# Altium PCB RF_AMPL_001.PcbDoc (part 1 of 2)
Units mm, origin at the board's own origin, x right, y up, seen from the top; angles counter-clockwise.
Board outline 164 x 92 mm, 4 copper layers (TOP, GND, SIG, BOT), stack 1.625 mm thick; 120 components, 60 nets, 294 pads, 1389 vias.
Unrouted connection lines stored in the file: 51.
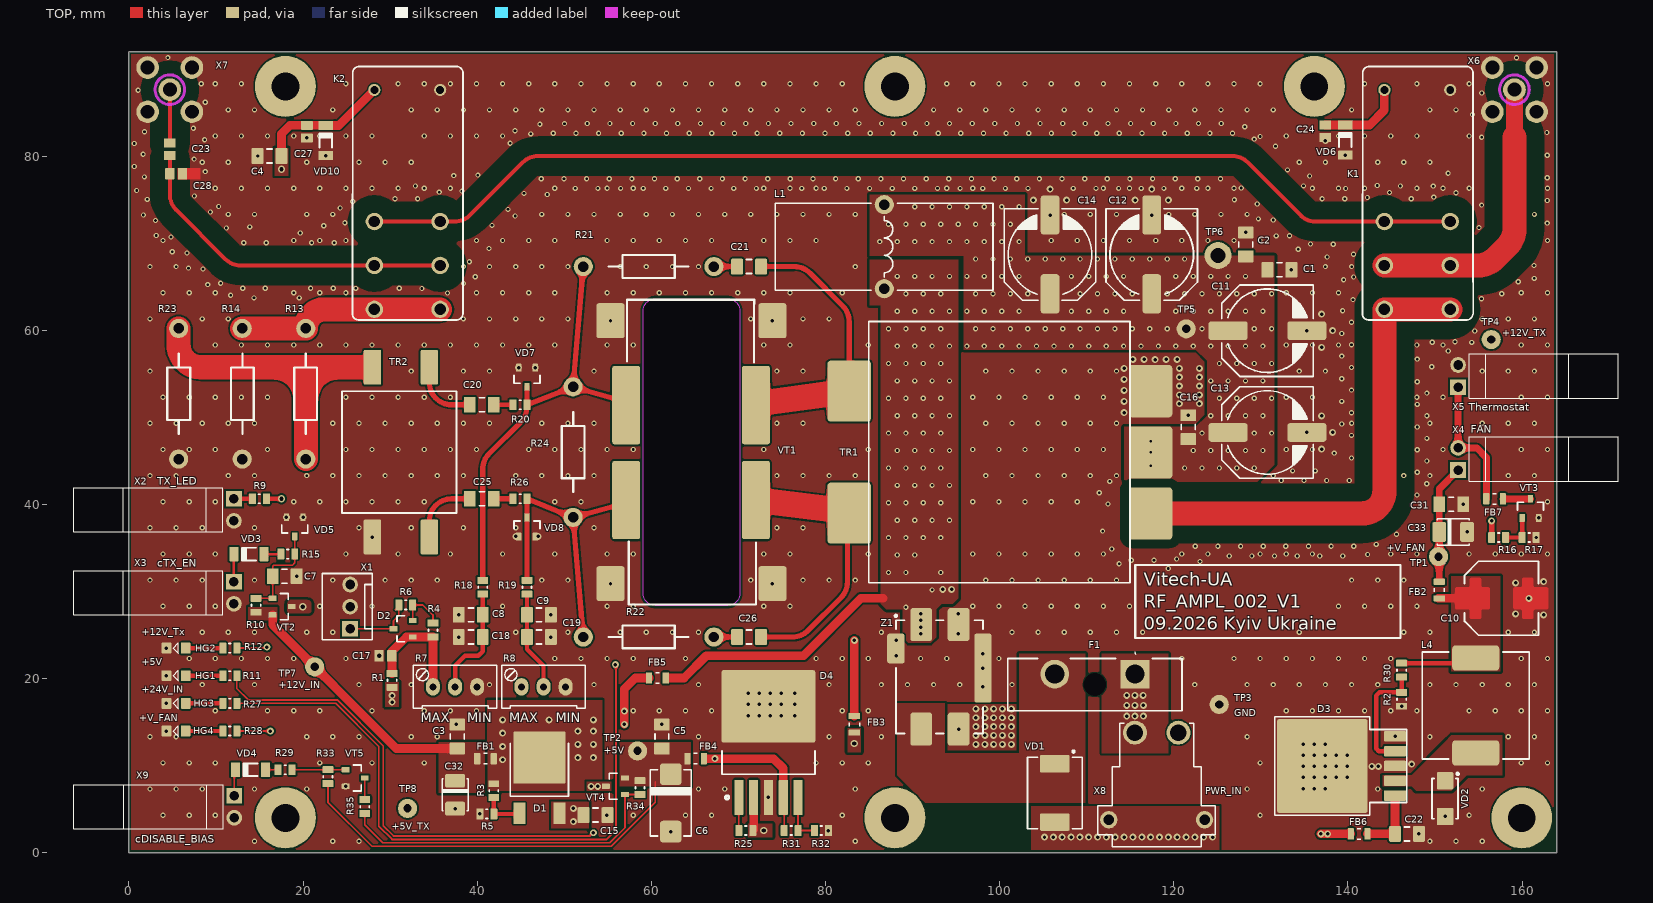
[diagram p0: TOP view]
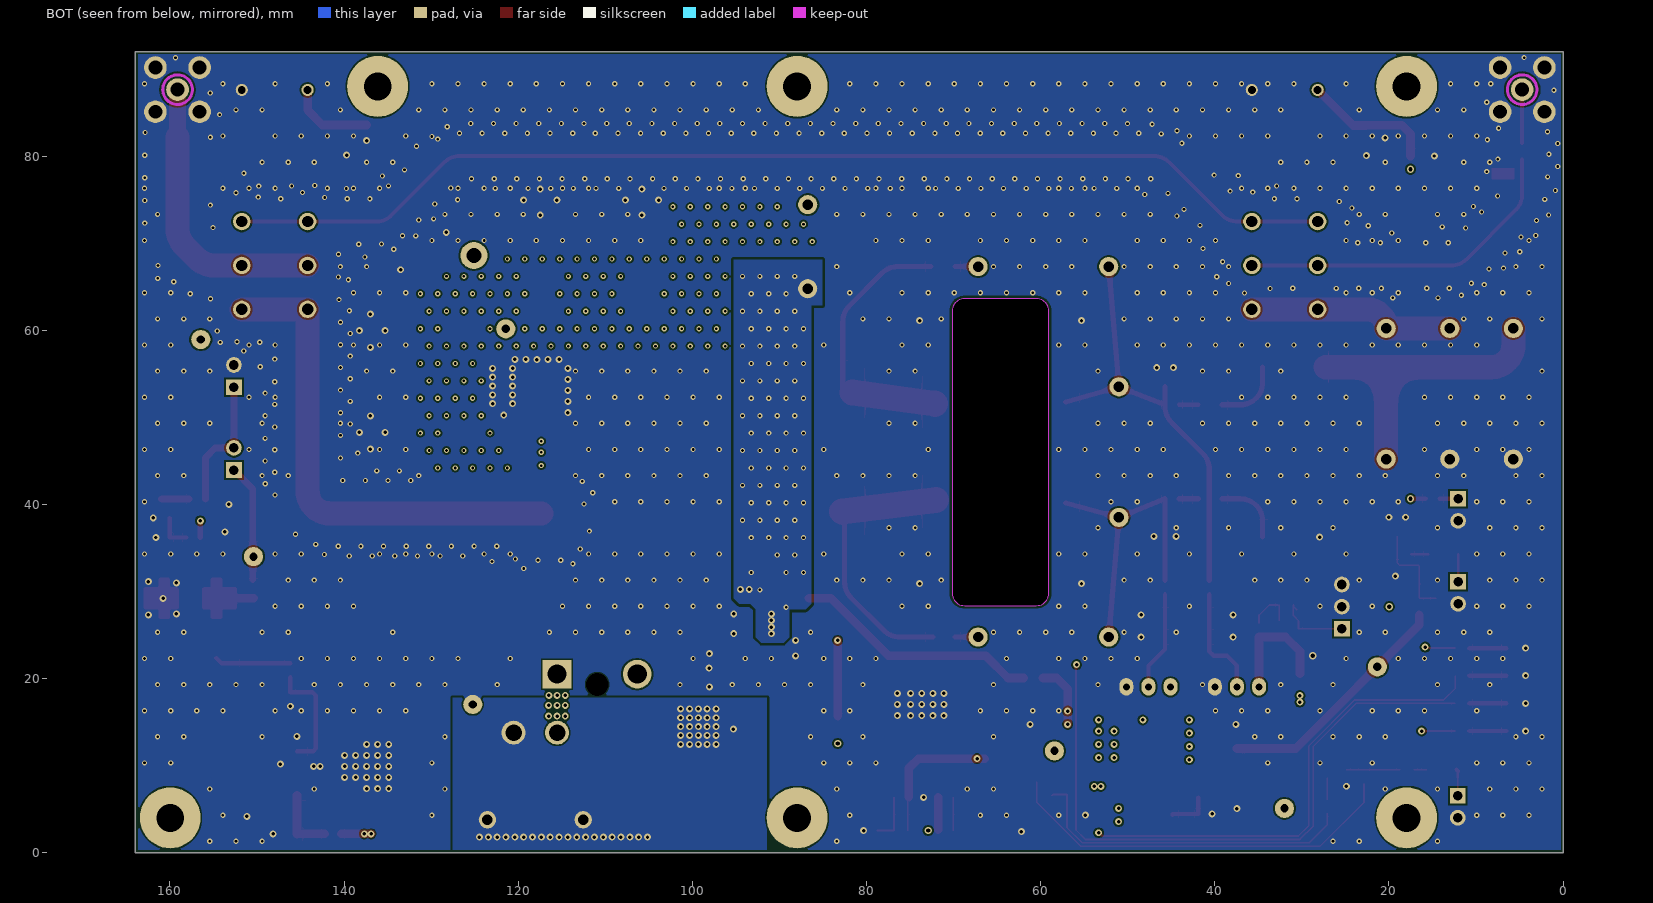
[diagram p1: BOT view, seen from below]
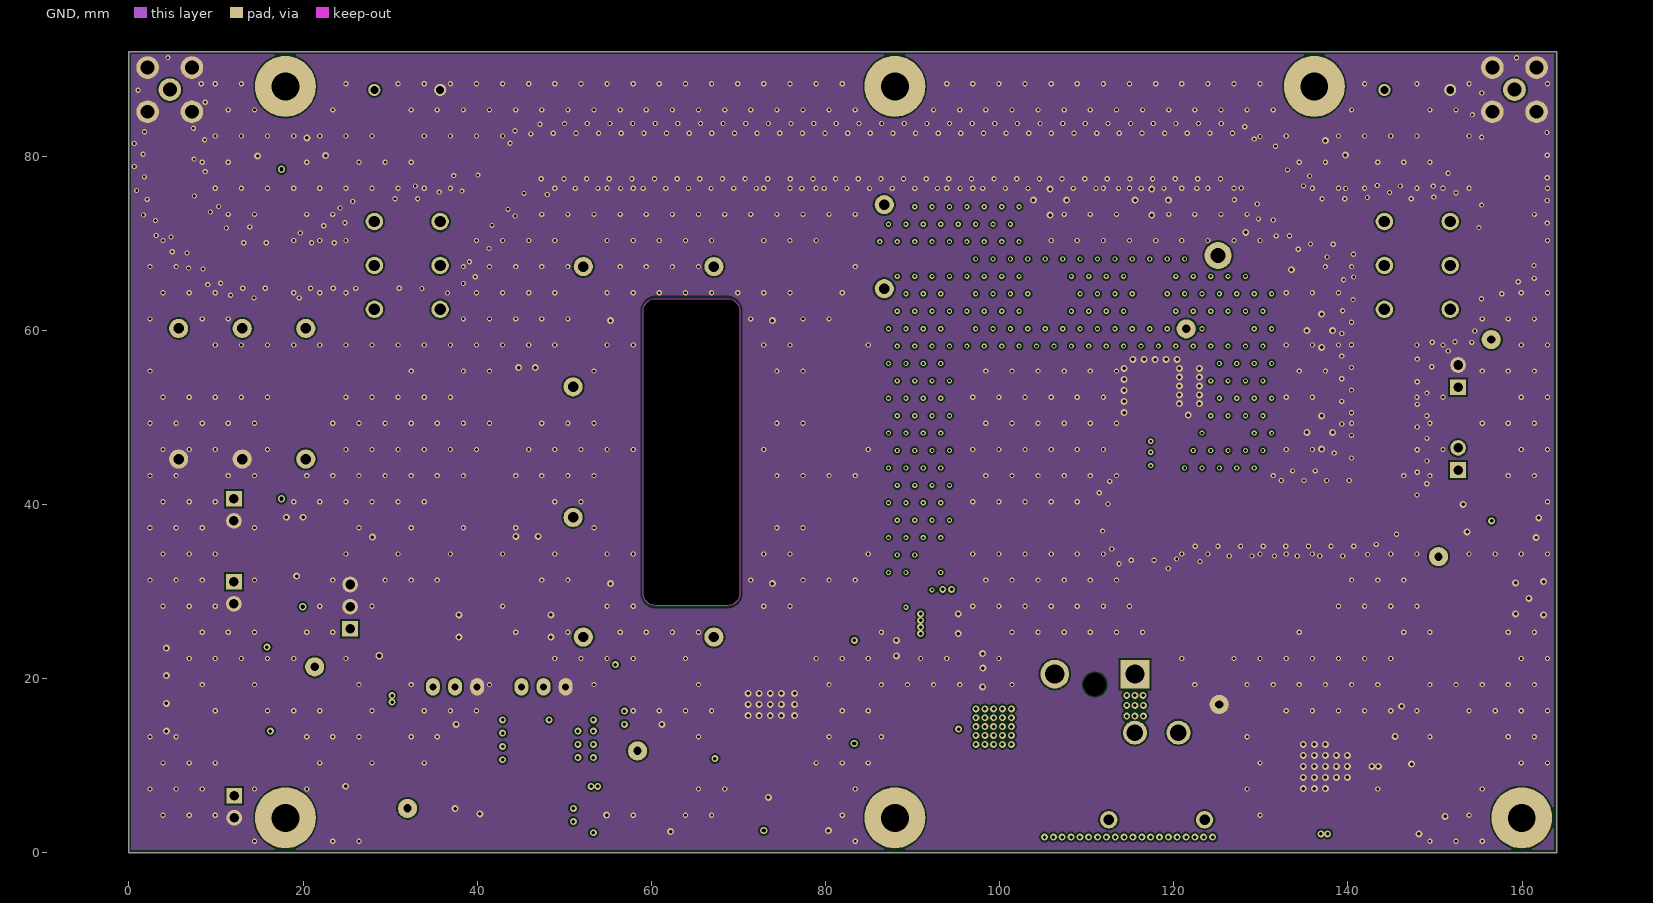
[diagram p2: GND]
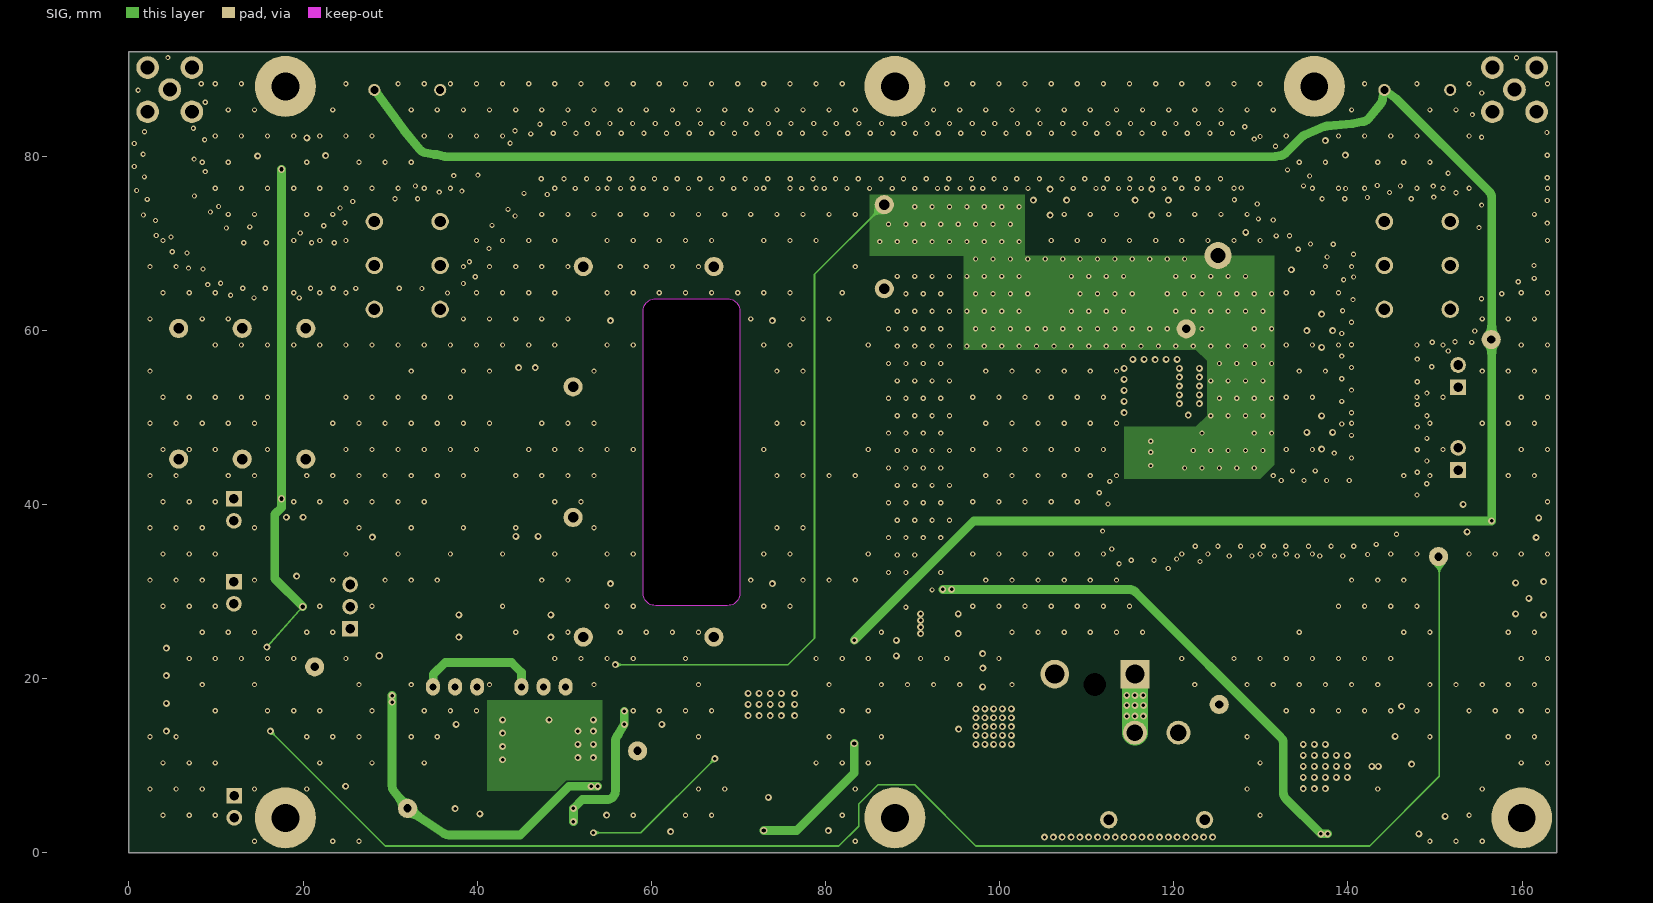
[diagram p3: SIG]
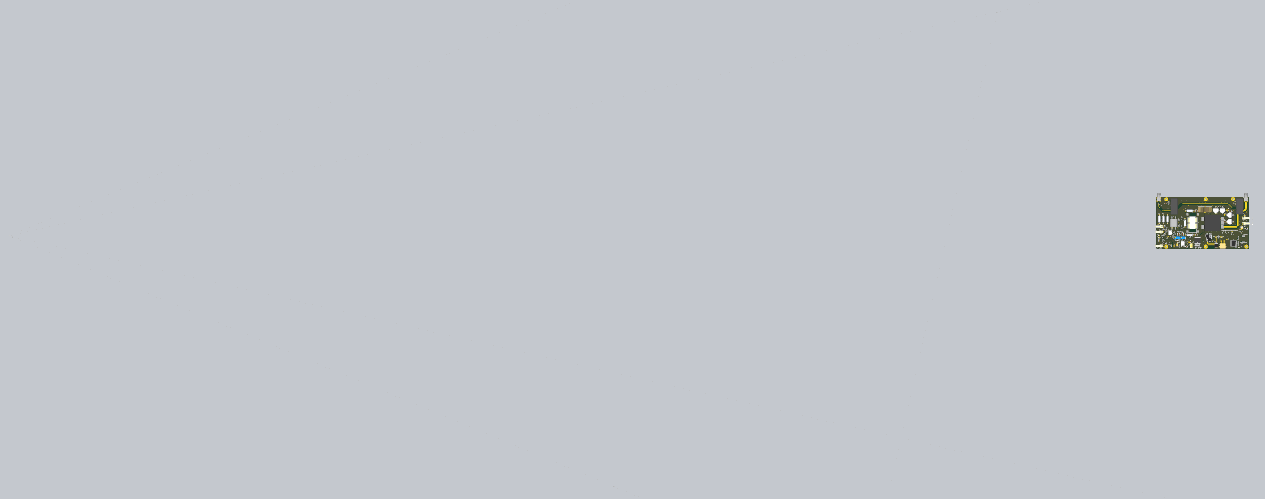
[diagram p5: 3D render of the assembled board from above, using the file's embedded part models]

## Layer stack, top to bottom
Top Solder: solder mask 0.012, Solder Resist, Dk 3.5
TOP: signal copper 0.035
Dielectric 1: prepreg 0.21, 7628, Dk 4.4
GND: signal copper 0.035
Dielectric 3: core 1.065, FR4, Dk 4.6
SIG: signal copper 0.035
Dielectric 2: prepreg 0.21, 7628, Dk 4.4
BOT: signal copper 0.035
Bottom Solder: solder mask 0.012, Solder Resist, Dk 3.5

## Board outline
-0.03,0 -0.03,92 163.97,92 163.97,0

## Design rules (kind name [scope] priority, off if disabled: settings)
BoardOutlineClearance BoardOutlineClearance_1 [OnLayer('Top Overlay')] p1: gap=0 ignorepadtopadclearanceinfootprint=FALSE
BoardOutlineClearance [All] p2: gap=0.3 ignorepadtopadclearanceinfootprint=FALSE
Clearance Clearance_CPW [InNetClass('CPW') vs OnLayer('TOP')] p1: gap=2.03 ignorepadtopadclearanceinfootprint=FALSE except(0.2: Arc-SMDPad Arc-THPad Arc-Region Track-SMDPad Track-Region SMDPad-Region; 0.3: Track-THPad SMDPad-SMDPad SMDPad-THPad; 0.7: Arc-Hole; 1: Track-Track SMDPad-Fill SMDPad-Poly)
Clearance MiddleVoltage [InNetClass('MiddleVoltage')] p2: gap=0.5 ignorepadtopadclearanceinfootprint=FALSE except(0: Arc-Hole Track-Hole SMDPad-Hole THPad-Hole Via-Hole Fill-Hole Poly-Hole Region-Hole Text-Hole; 0.2: Arc-Text Track-Text SMDPad-Text THPad-Text Via-Text Fill-Text Poly-Text Region-Text Text-Text)
Clearance HighVoltage [InNetClass('HighVoltage')] p3: gap=1 ignorepadtopadclearanceinfootprint=FALSE except(0: Arc-Hole Track-Hole SMDPad-Hole THPad-Hole Via-Hole Fill-Hole Poly-Hole Region-Hole Text-Hole; 0.2: Arc-Text Track-Text SMDPad-Text THPad-Text Via-Text Fill-Text Poly-Text Region-Text Text-Text)
Clearance Standart [All] p4: gap=0.15 ignorepadtopadclearanceinfootprint=FALSE except(0.1: THPad-Via; 0.2: Arc-Arc Arc-Track Arc-SMDPad Arc-THPad Arc-Via Arc-Fill Arc-Poly Arc-Region Track-Track Track-SMDPad Track-THPad Track-Via Track-Fill Track-Poly Track-Region SMDPad-Via SMDPad-Poly THPad-Poly Via-Poly Poly-Region Region-Region; 0.3: Arc-Hole Track-Hole Fill-Fill Fill-Poly Fill-Region Poly-Poly)
ComponentClearance [All] p1: gap=0.1 collisioncheckmode=3 verticalgap=0.1 showdistances=TRUE
Height [All] p1: minheight=0 maxheight=40 prefheight=12.7
HoleSize [All] p1: absolutevalues=TRUE maxlimit=12 minlimit=0.2 maxpercent=80.000 minpercent=20.000
HoleToHoleClearance [All] p1: gap=0.15 allowstackedmicrovias=TRUE
MinimumSolderMaskSliver [All] p1: minsoldermaskwidth=0.1
NetAntennae [All] p1: netantennaetolerance=2
PlaneClearance [All] p1: clearance=0.3
PlaneConnect PlaneConnectMiddleCurrent [InNetClass('MiddleCurrent')] p1: planeconnectstyle=Relief reliefexpansion=0.508 reliefentries=4 reliefconductorwidth=0.5 reliefairgap=0.3
PlaneConnect PlaneHighCurrent [InNetClass('HighCurrent')] p2: planeconnectstyle=Relief reliefexpansion=0.508 reliefentries=4 reliefconductorwidth=0.5 reliefairgap=0.35
PlaneConnect [All] p3: planeconnectstyle=Relief reliefexpansion=0.508 reliefentries=4 reliefconductorwidth=0.3 reliefairgap=0.3
PolygonConnect PolygonConnectMiddleCurrent [All vs InNetClass('MiddleCurrent')] p1: connectstyle=Relief reliefconductorwidth=0.4 reliefentries=4 polygonreliefangle="90 Angle" airgapwidth=0.3
PolygonConnect PolygonHighCurrent [InNetClass('HighCurrent')] p2: connectstyle=Relief reliefconductorwidth=0.5 reliefentries=4 polygonreliefangle="90 Angle" airgapwidth=0.3
PolygonConnect PolygonConnect_Keepout [(ObjectKind = 'Track') And (Layer = 'KeepOutLayer')] p3: connectstyle=Direct reliefconductorwidth=0.254 reliefentries=4 polygonreliefangle="90 Angle" airgapwidth=0.254
PolygonConnect PolygonConnect_Via [IsVia] p4: connectstyle=Direct reliefconductorwidth=0.254 reliefentries=4 polygonreliefangle="90 Angle" airgapwidth=0.254
PolygonConnect [All] p5: connectstyle=Direct reliefconductorwidth=0.6 reliefentries=4 polygonreliefangle="90 Angle" airgapwidth=0.2
RoomDefinition RF_AMPL_002 [InComponentClass('RF_AMPL_002')] p1: confinementstyle=ConfineIn formatcopy=TRUE lockcomponents=FALSE outline -783.757,-745.82 -732.957,-745.82 -732.957,-720.42 -783.757,-720.42
RoutingCorners [All] p1: cornerstyle=45-Degree minsetback=1 maxsetback=3
RoutingVias Power [InNetClass('Power')] p1: holewidth=0.8 width=1.5 viastyle="Through Hole" minholewidth=0.5 minwidth=1 maxholewidth=1.2 maxwidth=3
RoutingVias [All] p2: holewidth=0.4 width=0.8 viastyle="Through Hole" minholewidth=0.2 minwidth=0.4 maxholewidth=1 maxwidth=2
SilkToSilkClearance [All] p1: silktosilkclearance=0
SilkToSolderMaskClearance [IsVia vs IsText And OnTopSilkscreen] p1: minsilkscreentomaskgap=0.2 clearancetoexposedcopper=TRUE
SolderMaskExpansion SolderMaskExpansion_VIA [IsVia] p1: expansion=-3 istentingtop=TRUE useseparateexpansions=TRUE expansionbottom=-3 istentingbottom=TRUE
SolderMaskExpansion [All] p2: expansion=0.05 istentingtop=FALSE
SupplyNets "Schematic Supply Nets" [InNet('+V_FAN')] p1: voltage=0.000
SupplyNets "Schematic Supply Nets_8" [InNet('+5V_TX')] p2: voltage=0.000
SupplyNets "Schematic Supply Nets_7" [InNet('GND_IN')] p3: voltage=0.000
SupplyNets "Schematic Supply Nets_6" [InNet('+24V_IN')] p4: voltage=0.000
SupplyNets "Schematic Supply Nets_5" [InNet('GND')] p5: voltage=0.000
SupplyNets "Schematic Supply Nets_4" [InNet('BIAS_A')] p6: voltage=0.000
SupplyNets "Schematic Supply Nets_3" [InNet('BIAS_B')] p7: voltage=0.000
SupplyNets "Schematic Supply Nets_2" [InNet('+12V_IN')] p8: voltage=0.000
SupplyNets "Schematic Supply Nets_1" [InNet('+12V_TX')] p9: voltage=0.000
Width Width_CPW [InNetClass('CPW')] p1: maxlimit=2.77 minlimit=0.46 preferedwidth=2.77
Width Width_1 [All] p2: maxlimit=3 minlimit=0.2 preferedwidth=0.2
Width WidthMiddleCurrent [InNetClass('MiddleCurrent')] p3: maxlimit=2 minlimit=0.35 preferedwidth=0.5
Width WidthHighCurrent [InNetClass('HighCurrent')] p4: maxlimit=5 minlimit=0.5 preferedwidth=1
19 further rules are at their usual default settings.

## Classes and differential pairs
net class CPW: NetC23_1 NetC23_2 NetK1_3 NetK1_5 NetK1_7

## Components (designator, comment, footprint, x,y, rotation, side; value= is the part's Value field where it differs from the comment)
C1 "0.1" C_CERAMIC_1206_MED 132.137,66.944 r180 top
C2 "0.1" C_CERAMIC_1206_MED 128.27,69.85 r90 top
C3 "0.1" C_CERAMIC_1206_MED 37.719,13.335 r90 top
C4 "0.1" C_CERAMIC_1206_MED 16.151,80.01 r180 top
C5 "0.1" C_CERAMIC_1206_MED 61.214,13.335 r90 top
C6 "100мкФ" CAPM_CASE_D_7.3x4.3x3.1mm 62.23,5.715 r270 top
C7 "0.1" C_CERAMIC_1206_MED 17.885,31.75 r0 top
C8 "100" C_CERAMIC_1206_MED 39.265,27.305 r180 top
C9 "100" C_CERAMIC_1206_MED 47.095,27.305 r0 top
C10 "330мкФ" CAPA_CASE_F_Panasonic_FT 157.655,29.21 r0 top
C11 "330 мкФ" CAPA_CASE_G_10.4x10.4x10.5mm 130.763,59.944 r0 top
C12 "330 мкФ" CAPA_CASE_G_10.4x10.4x10.5mm 117.475,68.707 r90 top
C13 "330 мкФ" CAPA_CASE_G_10.4x10.4x10.5mm 130.763,48.26 r0 top
C14 "330 мкФ" CAPA_CASE_G_10.4x10.4x10.5mm 105.791,68.707 r90 top
C15 "0.1" C_CERAMIC_1206_MED 53.594,4.318 r0 top
C16 "0.1" C_CERAMIC_1206_MED 121.666,48.873 r90 top
C17 "18pF" C_CERAMIC_0805_HI 29.464,22.606 r180 top value=10мкФ
C18 "0.1" C_CERAMIC_1206_MED 39.265,24.765 r180 top
C19 "0.1" C_CERAMIC_1206_MED 47.095,24.765 r0 top
C20 "0.1" C_CERAMIC_1206_MED 40.535,51.435 r0 top
C21 "0.1" C_CERAMIC_1206_MED 71.225,67.31 r180 top value=4700
C22 "0.1" C_CERAMIC_1206_MED 146.79,2.152 r0 top
C23 "NC" C_CERAMIC_0805_HI 4.699,80.772 r90 top
C24 "18pF" C_CERAMIC_0805_HI 137.414,82.841 r90 top value=0.1мкФ
C25 "0.1" C_CERAMIC_1206_MED 40.535,40.64 r0 top
C26 "0.1" C_CERAMIC_1206_MED 71.225,24.765 r180 top value=4700
C27 "18pF" C_CERAMIC_0805_HI 20.447,82.804 r90 top value=0.1мкФ
C28 "NC" C_CERAMIC_0805_HI 5.424,77.978 r0 top
C31 "0.1" C_CERAMIC_1206_MED 151.87,40.005 r0 top
C32 "10мкФ" CAPM_CASE_B_3.5x2.8x2.1mm 37.465,6.655 r270 top
C33 "10мкФ" CAPM_CASE_B_3.5x2.8x2.1mm 152.095,36.83 r0 top
D1 "LM317MDTRKG" DPAK 47.145,9.525 r0 top
D2 "TL431ACDBZR" SOT-23_MED 31.496,25.715 r0 top
D3 "LM2596SX-ADJ/NOPB" TO-263-5-1 145.415,9.955 r90 top
D4 "NCP57152DSADJR4G" DDPAK-5 73.457,12.45 r0 top
F1 "STANDART_FUSE_HOLDER" 17861640001 115.541,20.504 r180 top
FB1 "BLM21PG221SN1D" BLM21PGxxxxN1-Series 40.955,10.795 r180 top value="220 Ohms @ 100MHz"
FB2 "BLM21PG221SN1D" BLM21PGxxxxN1-Series 150.495,30.16 r90 top value="220 Ohms @ 100MHz"
FB3 "BLM21PG221SN1D" BLM21PGxxxxN1-Series 83.312,14.732 r270 top value="220 Ohms @ 100MHz"
FB4 "BLM21PG221SN1D" BLM21PGxxxxN1-Series 65.085,10.795 r180 top value="220 Ohms @ 100MHz"
FB5 "BLM21PG221SN1D" BLM21PGxxxxN1-Series 60.706,20.066 r180 top value="220 Ohms @ 100MHz"
FB6 "BLM21PG221SN1D" BLM21PGxxxxN1-Series 141.29,2.159 r0 top value="220 Ohms @ 100MHz"
FB7 "BLM21PG221SN1D" BLM21PGxxxxN1-Series 156.845,40.64 r0 top value="220 Ohms @ 100MHz"
HG1 "LTST-C171GKT" LTST-C171GKT 5.418,20.32 r180 top
HG2 "LTST-C171GKT" LTST-C171GKT 5.418,23.495 r180 top
HG3 "LTST-C171GKT" LTST-C171GKT 5.418,17.145 r180 top
HG4 "LTST-C171GKT" LTST-C171GKT 5.418,13.97 r180 top
K1 "HF115F/012-2ZS4" HF115Fxxx-1(2)Zx3(4) 147.97,75 r270 top
K2 "HF115F/012-2ZS4" HF115Fxxx-1(2)Zx3(4) 31.97,75 r270 top
L1 "Fixed inductor, 10мкH, ±20%, R22.9/14/7.62, Kool Mu, µ=125, 90 нГн/витков2" "IND: R22.9/14/7.62 (H)" 86.741,69.596 r270 top value=10мкH
L4 "33 мкГн" INDPWR_Sumida_CDRH127/LD_INDM120120X80N 154.686,16.902 r90 top
R1 "100" R_ANY_CHIP_0805_HI 30.226,19.774 r90 top
R2 "10кОм" R_ANY_CHIP_0805_HI 146.177,17.615 r270 top
R3 "240" R_ANY_CHIP_0805_HI 41.91,7.112 r90 top
R4 "1к5" R_ANY_CHIP_0805_HI 34.925,25.565 r90 top
R5 "2кОм" R_ANY_CHIP_0805_HI 41.11,4.445 r0 top
R6 "1к8" R_ANY_CHIP_0805_HI 31.796,28.448 r180 top
R7 "10k" 3296W-1-xxx 37.465,19.05 r270 top
R8 "10k" 3296W-1-xxx 47.625,19.05 r270 top
R9 "2к2" R_ANY_CHIP_0805_HI 14.986,40.64 r0 top
R10 "10к" R_ANY_CHIP_0805_HI 14.605,28.41 r270 top
R11 "390" R_ANY_CHIP_0805_HI 11.595,20.32 r0 top
R12 "2к" R_ANY_CHIP_0805_HI 11.595,23.495 r180 top
R13 "68" FKN2WS-Series 20.32,52.705 r270 top
R14 "100" FKN2WS-Series 13.018,52.705 r90 top
R15 "100" R_ANY_CHIP_0805_HI 18.25,34.29 r180 top
R16 "750" R_ANY_CHIP_0805_HI 157.315,36.195 r0 top
R17 "10к" R_ANY_CHIP_0805_HI 160.82,36.195 r180 top
R18 "100" R_ANY_CHIP_0805_HI 40.64,30.48 r90 top
R19 "100" R_ANY_CHIP_0805_HI 45.72,30.48 r90 top
R20 "10" R_ANY_CHIP_0805_HI 44.92,51.435 r0 top
R21 "750" FKN2WS-Series 59.69,67.31 r180 top
R22 "750" FKN2WS-Series 59.69,24.765 r180 top
R23 "100" FKN2WS-Series 5.715,52.705 r90 top
R24 "100" FKN2WS-Series 51.012,46 r90 top
R25 "10кОм" R_ANY_CHIP_0805_HI 70.853,2.54 r180 top
R26 "10" R_ANY_CHIP_0805_HI 44.92,40.64 r0 top
R27 "4k7" R_ANY_CHIP_0805_HI 11.595,17.145 r180 top
R28 "2k" R_ANY_CHIP_0805_HI 11.595,13.97 r180 top
R29 "10" R_ANY_CHIP_0805_HI 17.945,9.525 r180 top
R30 "100кОм" R_ANY_CHIP_0805_HI 146.177,20.955 r270 top
R31 "30кОм" R_ANY_CHIP_0805_HI 76.06,2.54 r0 top
R32 "10кОм" R_ANY_CHIP_0805_HI 79.54,2.54 r0 top
R33 "10к" R_ANY_CHIP_0805_HI 22.86,8.725 r270 top
R34 "1к" R_ANY_CHIP_0805_HI 58.705,7.47 r90 top
R35 "100" R_ANY_CHIP_0805_HI 27.092,5.296 r90 top
TP1 "PAD-0.96mm" PAD-0.96mm 150.411,34 r0 top
TP2 "PAD-0.96mm" PAD-0.96mm 58.42,11.684 r90 top
TP3 "PAD-0.96mm" PAD-0.96mm 125.222,17.018 r90 top
TP4 "PAD-0.96mm" PAD-0.96mm 156.464,58.928 r90 top
TP5 "PAD-0.96mm" PAD-0.96mm 121.433,60.157 r90 top
TP6 "PAD-1.75mm" PAD-1.75mm 125.095,68.58 r0 top
TP7 "PAD-0.96mm" PAD-0.96mm 21.336,21.336 r90 top
TP8 "PAD-0.96mm" PAD-0.96mm 32.004,5.08 r90 top
TR1 "TR" Amidon_43-7051 99.97,46 r0 top
TR2 "TR" Amidon_43-202 31.242,46 r90 top
VD1 "ES3D" SMC 106.341,6.858 r270 top
VD2 "SK34SMA-3G" SMA_MED 151.159,6.205 r270 top
VD3 "LL4148" SOD-80C_MED 13.79,34.29 r0 top
VD4 "LL4148" SOD-80C_MED 13.97,9.525 r0 top
VD5 "PESD12VL2BT.215" SOT-23_MED 19.05,37.422 r90 top
VD6 "LL4148" SOD-80C_MED 139.7,81.841 r270 top
VD7 "PESD12VL2BT.215" SOT-23_MED 45.72,54.6 r90 top
VD8 "PESD12VL2BT.215" SOT-23_MED 45.72,37.4 r270 top
VD10 "LL4148" SOD-80C_MED 22.606,81.788 r270 top
VT1 "MRF186" MRF186 64.612,46 r270 top
VT2 "IRLML9303TRPbF" SOT-23_MED 17.61,28.26 r180 top
VT3 "IRLML0100TR" SOT-23_MED 160.97,39.54 r270 top
VT4 "IRLML9303TRPbF" SOT-23_MED 55.88,7.62 r0 top
VT5 "BC847B" SOT-23_MED 25.992,8.575 r180 top
X1 "WH-03S" WF-3S 25.4,25.715 r90 top
X2 "WH-02R" WF-2R 12.065,39.37 r90 top
X3 "WH-02R" WF-2R 12.065,29.845 r90 top
X4 "WH-02R" WF-2R 152.654,45.212 r270 top
X5 "WH-02R" WF-2R 152.654,54.737 r270 top
X6 "WSD-SMAKWE-14.5" KLS1-SMA002 159.131,87.63 r270 top
X7 "WSD-SMAKWE-14.5" KLS1-SMA002 4.699,87.63 r270 top
X8 "XT30PW-M" XT30PW-M 118.041,5.279 r90 top
X9 "WH-02R" WF-2R 12.094,5.271 r90 top
Z1 "" Murata_BNX02xH01x 93.091,20.193 r90 top

## Footprints (in the part's own frame and the unit in brackets; to place one, negate y for a bottom-side part, rotate by r counter-clockwise, add the part's x,y. Pads: shape width x height; smd on the part's side, far side on the other; paste and mask are expansions set on the pad)
3296W-1-xxx [mm] "Square Trimpot Trimming Potentiometer"
  oval 2x1.6 hole 0.8 mask+0.05: 1(0,-2.54) 2(0,0) 3(0,2.54)
  silkscreen extent -2.45,-4.8 2.45,4.8, body extent -2.45,-4.76 2.38,4.76, height 11.6
17861640001 [mm] "Automotive Fuse holder THT-Mount"
  rect 3.3x3.3 hole 2.2: 1(0,0)
  round 3.3 hole 2.2: 2(9.2,0)
  round 1.3 hole 2.6 unplated: MH1(4.6,1.2)
  silkscreen extent -5.4,-2.51 14.6,4.2, body extent -5.51,-1.78 14.64,4.22, height 17.65
Amidon_43-202 [mm]
  rrect15% 4x2 smd mask+0.05: 1(-9.75,3.27) 2(9.75,3.27) 3(-9.75,-3.27) 4(9.75,-3.27)
  silkscreen extent -6.98,-6.38 6.98,6.76, body extent -7,-6.35 7,6.75, height 7.75
Amidon_43-7051 [mm]
  rrect15% 5x6 smd mask+0.05: 1(17.37,6.998) 2(17.37,-7.041) 4(17.37,-0.04)
  rrect15% 5x7 smd mask+0.05: 3(-17.243,-7.002) 5(-17.243,7.002)
  silkscreen extent -15,-15 15,15, body extent -14.35,-14.28 14.35,14.28, height 14.33
BLM21PGxxxxN1-Series [mm] "Chip Inductor, 2-Leads, Body 2,00x1,25mm, IPC Medium Density"
  rrect15% 0.7x1.3 smd mask+0.05: 1(0.95,0) 2(-0.95,0)
  silkscreen extent -0.2,-0.6 0.2,0.6, body extent -1,-0.6 1,0.6, height 0.95
C_CERAMIC_0805_HI [mm] "Chip Capacitor, 2-Leads, Body 2,00x1,25mm, IPC High Density"
  rrect15% 1.05x1.35 smd mask+0.05: 1(-0.725,0) 2(0.725,0)
  TOP pour cut-out: -0.05,0.65 0.05,0.65 0.05,-0.65 -0.05,-0.65
  body extent -1.1,-0.72 1.1,0.73, height 1.35
C_CERAMIC_1206_MED [mm] "Chip Capacitor, 2-Leads, Body 3,20x1,60mm, IPC Medium Density"
  rrect15% 1.35x1.8 smd mask+0.05: 1(-1.375,0) 2(1.375,0)
  silkscreen extent -0.3,-0.8 0.3,0.8, body extent -1.7,-0.9 1.7,0.9, height 1.8
CAPA_CASE_F_Panasonic_FT [mil] "Aluminum Electrolytic Capacitor, Body 8.3x8.3x10.5mm, FT series, Panasonic"
  round 1 smd mask+1.97: 1(-131.89,0) 2(131.89,0)
  TOP region: 210.63,-41.34 210.63,41.34 210.03,44.35 208.32,46.91 205.77,48.61 202.76,49.21 202.76,49.21 151.57,49.21 148.56,49.81 146.01,51.52 144.3,54.07 143.7,57.09 143.7,57.09 143.7,84.65 143.1,87.66 141.39,90.21 138.84,91.92 135.83,92.52 135.83,92.52 100.39,92.52 97.38,91.92 94.83,90.21 93.12,87.66 92.52,84.65 92.52,84.65 92.52,57.09 91.92,54.07 90.21,51.52 87.66,49.81 84.65,49.21 84.65,49.21 61.02,49.21 58.01,48.61 55.46,46.91 53.75,44.35 53.15,41.34 53.15,41.34 53.15,-41.34 53.75,-44.35 55.46,-46.91 58.01,-48.61 61.02,-49.21 61.02,-49.21 84.65,-49.21 87.66,-49.81 90.21,-51.52 91.92,-54.07 92.52,-57.09 92.52,-57.09 92.52,-84.65 93.12,-87.66 94.83,-90.21 97.38,-91.92 100.39,-92.52 100.39,-92.52 135.83,-92.52 138.84,-91.92 141.39,-90.21 143.1,-87.66 143.7,-84.65 143.7,-84.65 143.7,-57.09 144.3,-54.07 146.01,-51.52 148.56,-49.81 151.57,-49.21 151.57,-49.21 202.76,-49.21 205.77,-48.61 208.32,-46.91 210.03,-44.35 210.63,-41.34
  TOP region: -210.63,-41.34 -210.63,41.34 -210.03,44.35 -208.32,46.91 -205.77,48.61 -202.76,49.21 -202.76,49.21 -151.57,49.21 -148.56,49.81 -146.01,51.52 -144.3,54.07 -143.7,57.09 -143.7,57.09 -143.7,84.65 -143.1,87.66 -141.39,90.21 -138.84,91.92 -135.83,92.52 -135.83,92.52 -100.39,92.52 -97.38,91.92 -94.83,90.21 -93.12,87.66 -92.52,84.65 -92.52,84.65 -92.52,57.09 -91.92,54.07 -90.21,51.52 -87.66,49.81 -84.65,49.21 -84.65,49.21 -61.02,49.21 -58.01,48.61 -55.46,46.91 -53.75,44.35 -53.15,41.34 -53.15,41.34 -53.15,-41.34 -53.75,-44.35 -55.46,-46.91 -58.01,-48.61 -61.02,-49.21 -61.02,-49.21 -84.65,-49.21 -87.66,-49.81 -90.21,-51.52 -91.92,-54.07 -92.52,-57.09 -92.52,-57.09 -92.52,-84.65 -93.12,-87.66 -94.83,-90.21 -97.38,-91.92 -100.39,-92.52 -100.39,-92.52 -135.83,-92.52 -138.84,-91.92 -141.39,-90.21 -143.1,-87.66 -143.7,-84.65 -143.7,-84.65 -143.7,-57.09 -144.3,-54.07 -146.01,-51.52 -148.56,-49.81 -151.57,-49.21 -151.57,-49.21 -202.76,-49.21 -205.77,-48.61 -208.32,-46.91 -210.03,-44.35 -210.63,-41.34
  silkscreen extent -167,-167 167,167, body extent -191,-163 191,163, height 414
CAPA_CASE_G_10.4x10.4x10.5mm [mm] "Aluminum Electrolytic Capacitor, Body 10.40x10.40x10.50mm, IPC Medium Density"
  rrect30% 4.5x2.15 smd mask+0.1: 1(-4.525,0) 2(4.525,0)
  silkscreen extent -5.25,-5.25 5.25,5.25, body extent -5.5,-5.2 5.5,5.2, height 10.41
CAPM_CASE_B_3.5x2.8x2.1mm [mm] "Molded Capacitor, 2-Leads, Body 3.50x2.8mm."
  rrect30% 1.6x2.3 smd paste+0 mask+0.05: 1(-1.6,0) 2(1.6,0)
  silkscreen extent -1.85,-1.5 1.85,1.5, body extent -1.83,-1.4 1.83,1.4, height 1.9
CAPM_CASE_D_7.3x4.3x3.1mm [mm] "Molded Capacitor, 2-Leads, Body 7.3x4.3mm"
  rrect30% 2.5x2.5 smd paste+0 mask+0.05: 1(-3.3,0) 2(3.3,0)
  silkscreen extent -3.8,-2.35 3.8,2.35, body extent -3.8,-2.3 3.8,2.3, height 3.1
DDPAK-5 [mm] "D2-PAK, 5-Pads, Body 9.3x10.2mm (max), IPC Medium Density"
  rrect15% 1.05x4.039 smd mask+0.05: 1(-3.404,-6.1) 2(-1.702,-6.1) 3(0,-6.1) 4(1.702,-6.1) 5(3.404,-6.1)
  rrect5% 10.75x8.319 smd: 3(0,4.343)
  silkscreen extent -5.35,-6.3 5.35,-0.75, body extent -5.33,-7.21 5.32,7.7, height 4.82
DPAK [mm]
  rrect15% 1.4x2.5 smd mask+0.05: 1(-2.3,-5) 3(2.3,-5)
  rrect5% 6x6 smd paste-2539.97 mask+0.05: 2(0,1.4)
  silkscreen extent -3.35,-3.05 3.35,3.05, body extent -3.36,-6.03 3.36,4.38, height 2.39
FKN2WS-Series [mm]
  round 2.2 hole 1.2 mask+0.05: 1(-7.5,0) 2(7.5,0)
  silkscreen extent -4.59,-1.33 4.59,1.3, body extent -7.9,-2.55 7.9,2.55, height 4.85
HF115Fxxx-1(2)Zx3(4) [mm] "Miniature High Power Relay"
  round 1.4 hole 0.9: 1(-12.6,3.78) 2(-12.6,-3.78)
  round 2 hole 1.3: 3(2.52,3.78) 4(2.52,-3.78) 5(7.56,3.78) 6(7.56,-3.78) 7(12.6,3.78) 8(12.6,-3.78)
  silkscreen extent -15.29,-6.3 13.82,6.41, body extent -15.17,-6.35 13.83,6.35, height 15.7
"IND: R22.9/14/7.62 (H)" [mm]
  round 2.2 hole 1.2: 1(-4.83,0.015) 2(4.83,0.015)
  silkscreen extent -5,-12.5 5,12.5, body extent -4.83,-12.47 4.83,12.47, height 24.77
INDPWR_Sumida_CDRH127/LD_INDM120120X80N [mm] "Molded Inductor, 2-Leads, Body 12.00x12.00mm, IPC Medium Density"
  rrect25% 2.9x5.4 smd: 1(-5.45,0) 2(5.45,0)
  silkscreen extent -6.15,-6.15 6.15,6.15, body extent -6.15,-6 6.2,6, height 7.5
KLS1-SMA002 [mm] "SMA Connector, Right Angle"
  round 2.6 hole 1.6 mask+0.05: 1(0,0) 2(-2.54,2.54) 2(-2.54,-2.54) 2(2.54,2.54) 2(2.54,-2.54)
  TOP pour cut-out: -1.9,0 -1.755,-0.727 -1.344,-1.344 -0.727,-1.755 0,-1.9 0,-1.9 0.727,-1.755 1.344,-1.344 1.755,-0.727 1.9,0 1.9,0 1.755,0.727 1.344,1.344 0.727,1.755 0,1.9 0,1.9 -0.727,1.755 -1.344,1.344 -1.755,0.727 -1.9,0
  TOP keep-out circle w0.35: c0,0 r1.7
  BOT pour cut-out: -1.9,0 -1.755,-0.727 -1.344,-1.344 -0.727,-1.755 0,-1.9 0,-1.9 0.727,-1.755 1.344,-1.344 1.755,-0.727 1.9,0 1.9,0 1.755,0.727 1.344,1.344 0.727,1.755 0,1.9 0,1.9 -0.727,1.755 -1.344,1.344 -1.755,0.727 -1.9,0
  BOT keep-out circle w0.35: c0,0 r1.7
  body extent -11.58,-3.2 3.28,3.15, height 9.57
LTST-C171GKT [mm]
  rrect15% 1.1x1.25 smd mask+0.05: AN(-1.1,0) CA(1.1,0)
  silkscreen extent -0.25,-0.6 0.35,0.6, body extent -1.05,-0.67 1.05,0.68, height 0.9
MRF186 [mm]
  rrect15% 9x3.2 smd mask+0.05: 1(-5.4,7.4) 2(5.5,7.4) 3(-5.4,-7.5) 4(5.5,-7.5)
  rrect15% 4x3.2 smd mask+0.05: 5(-15.1,9.3) 5(-15.1,-9.3) 5(15.1,9.3) 5(15.1,-9.3)
  Keep-Out Layer board cut-out: -16.23,-5.527 -16.765,-5.421 -17.218,-5.118 -17.521,-4.665 -17.627,-4.13 -17.627,-4.13 -17.627,4.136 -17.521,4.671 -17.218,5.125 -16.765,5.427 -16.23,5.534 -16.23,5.534 16.23,5.534 16.765,5.427 17.218,5.125 17.521,4.671 17.627,4.136 17.627,4.136 17.627,-4.13 17.521,-4.665 17.218,-5.118 16.765,-5.421 16.23,-5.527 16.23,-5.527 10.875,-5.527 -10.66,-5.527
  silkscreen extent -17.5,-7.4 17.5,7.4, body extent -16.95,-7.35 17.05,7.25, height 2.3
Murata_BNX02xH01x [mm] "Chip Resistor, 2-Leads, Body 2.00x1.25mm, IPC Medium Density"
  rrect25% 3.8x2.5 smd mask+0.05: 1(-6,2.1) 2(6,2.1) 3(-6,-2.2) 4(6,-2.2)
  rrect25% 3.4x2 smd mask+0.05: 5(3.25,5)
  rrect25% 7.9x2 smd mask+0.05: 6(1,-5)
  silkscreen extent -6.5,-5 7.12,5.12, body extent -6.05,-4.55 6.05,4.55, height 3.1
PAD-0.96mm [mm]
  round 2.2 hole 0.96: 1(0,0)
PAD-1.75mm [mm]
  round 3.1 hole 1.75: 1(0,0)
R_ANY_CHIP_0805_HI [mm] "Chip Resistor, 2-Leads, Body 2,00x1,25mm, IPC High Density"
  rrect15% 0.8x1.25 smd: 1(-0.8,0) 2(0.8,0)
  silkscreen extent -0.1,-0.53 0.1,0.53, body extent -1,-0.67 1,0.68, height 0.6
SMA_MED [mm] "Molded Diode, 2-Leads, Body 4,30x2,61mm, IPC Medium Density"
  rrect15% 2x1.9 smd mask+0.05: AN(2.05,0) CA(-2.05,0)
  silkscreen extent -2.97,-1.5 2.3,1.58, body extent -2.52,-1.46 2.52,1.46, height 2.44
SMC [mm] "Molded Diode, 2-Leads, Body 7,95x5,90mm, IPC Medium Density"
  rrect15% 2x3.4 smd: AN(3.35,0) CA(-3.35,0)
  silkscreen extent -4.87,-3.15 4.1,3.15, body extent -3.9,-2.95 3.9,2.95, height 2.45
SOD-80C_MED [mm] "MELF Diode, 2-Leads, Body 3,50x1,45mm, IPC Medium Density"
  rrect15% 1.05x1.65 smd mask+0.05: AN(1.725,0) CA(-1.725,0)
  silkscreen extent -0.8,-0.72 0.8,0.72, body extent -1.75,-0.72 1.75,0.72, height 1.45
SOT-23_MED [mm] "SOT23, 3-Leads, Body 2,92x2,37mm, Pitch 0,95mm, IPC Medium Density"
  rrect15% 0.9x0.6 smd mask+0.05: 1(1.1,-0.95) 2(1.1,0.95) 3(-1.1,0)
  silkscreen extent -0.7,-1.5 0.2,1.5, body extent -1.25,-1.5 1.25,1.5, height 1.1
TO-263-5-1 [mm]
  rrect15% 1.2x2.5 smd mask+0.05: 1(-3.4,0) 2(-1.7,0) 3(0,0) 4(1.7,0) 5(3.4,0)
  rrect5% 10.8x10.4 smd mask+0.05: 6(0,8.35)
  silkscreen extent -5.65,-1.35 5.65,13.8, body extent -5.08,-1.07 5.08,13.57, height 4.57
WF-2R [mm]
  rect 1.8x1.8 hole 1.1: 1(1.27,0)
  round 1.8 hole 1.1: 2(-1.27,0)
  silkscreen extent -2.54,1.27 2.54,18.41, body extent -2.54,-0.33 2.54,13.5, height 5.8
WF-3S [mm] "Connector; Header; 3 Position"
  rect 1.8x1.8 hole 1.1: 1(0,0)
  round 1.8 hole 1.1: 2(2.54,0) 3(5.08,0)
  silkscreen extent -1.27,-2.54 6.35,3.2, body extent -1.25,-2.6 6.25,3.2, height 11.62
XT30PW-M [mm]
  round 2.75 hole 1.9: 1(8.5,2.5) 2(8.5,-2.5)
  round 2 hole 1.2: MP(-1.5,5.5) MP(-1.5,-5.5)
  silkscreen extent -4.6,-6.75 9.6,6.75, body extent -4.5,-6.65 9.45,6.65, height 5.05

## Part data
C1 C2 C3 C4 C5 C15 C16 C22 C31: library part 1206B102K102CG, "1nF 1000V X7R ±10% 1206 Ceramic Capacitor RoHS", Dielectric Type=X7R, Manufacturer=Walsin, Package=1206, Supplier Part Number 1=791-1206B102K102CT, Temperature Range="-55°C ~ 125°C", Tolerance=±10%, Voltage=100V, Component Status=Released, Component Type=SMD, ComponentLink1Description=Datasheet, ComponentLink1URL=https://eu.mouser.com/datasheet/2/210/Middle_and_High_Voltage_DS-1535659.pdf, Part Number=1206B102K102CG, Part Type="Ceramic / X7R / 1206", Price=0, Replacement=NONE, Standard Lead Time="31 Weeks", Supplier 1=Mouser
C6: library part CAP_TANTALUM_POLAR_CASE_D, "Capacitor Tantalum *pF ±*% *V Case D", Dielectric=X7R, Manufacturer=AVX, Max Operating Temperature=+125°C, Min Operating Temperature=-55°C, Package="Case D", Part Number=TAJD107M016R, Tolerance=±*%, Voltage=16В, ComponentLink1Description="Datasheet Link", Mount=SMT, Name="100мкФ ±*% 16В X7R Case D TAJD107M016R [AVX]", Number of Pins=2, Type="Конденсатор танталовий"
C7: library part 1206B102K102CG, "1nF 1000V X7R ±10% 1206 Ceramic Capacitor RoHS", Dielectric Type=X7R, Manufacturer=Walsin, Package=1206, Supplier Part Number 1=791-1206B102K102CT, Temperature Range="-55°C ~ 125°C", Tolerance=±10%, Voltage=50V, Component Status=Released, Component Type=SMD, ComponentLink1Description=Datasheet, ComponentLink1URL=https://eu.mouser.com/datasheet/2/210/Middle_and_High_Voltage_DS-1535659.pdf, Part Number=1206B102K102CG, Part Type="Ceramic / X7R / 1206", Price=0, Replacement=NONE, Standard Lead Time="31 Weeks", Supplier 1=Mouser
C8 C9 C18 C19 C20 C25: library part 1206B102K102CG, "1nF 1000V X7R ±10% 1206 Ceramic Capacitor RoHS", Dielectric Type=X7R, Manufacturer=Walsin, Package=1206, Supplier Part Number 1=791-1206B102K102CT, Temperature Range="-55°C ~ 125°C", Tolerance=±10%, Voltage=1000V, Component Status=Released, Component Type=SMD, ComponentLink1Description=Datasheet, ComponentLink1URL=https://eu.mouser.com/datasheet/2/210/Middle_and_High_Voltage_DS-1535659.pdf, Part Number=1206B102K102CG, Part Type="Ceramic / X7R / 1206", Price=0, Replacement=NONE, Standard Lead Time="31 Weeks", Supplier 1=Mouser
C10: library part CAP_ELECTROLYTIC_POLAR_CASE_F_Panasonic_FT, "Capacitor Electrolytic *pF ±*% *V Case F", Manufacturer=Panasonic, Max Operating Temperature=+105°C, Min Operating Temperature=-55°C, Package="Case F", Part Number=EEEFK1C331P, Tolerance=±*%, Voltage=16В, ComponentLink1Description="Datasheet Link", Mount=SMT, Name="330мкФ ±*% 16В  Case F EEEFK1C331P [Panasonic]", Number of Pins=2, Type="Конденсатор електролітичний поляризований"
C11 C12 C13 C14: library part CAP_ELECTROLYTIC_POLAR_CASE_G, "Capacitor Electrolytic *pF ±*% *V Case G", Max Operating Temperature=+125°C, Min Operating Temperature=-55°C, Package="Case G", Tolerance=±*%, Voltage=*В, ComponentLink1Description="Datasheet Link", Mount=SMT, Name="330 мкФ ±*% *В  Case G * [*]", Number of Pins=2, Type="Конденсатор електролітичний поляризований"
C17 C23 C24 C27 C28: library part CERAMIC_0805, Dielectric Type=C0G/NP0, Manufacturer=Hitano, Package=0805, Part Number=**, Temperature Range="-55°C ~ 125°C", Tolerance=±5%, Voltage=50V, Component Status=Released, Component Type=SMD, ComponentLink1Description=Datasheet, ComponentLink1URL=\\altiumdb.ajax.local\files\Datasheet\Capacitor\Hitano-MLCC.pdf, GUID_1C=32087c8a-96b8-11ea-ab61-0050569f2651, Part Type="Ceramic / C0G(NP0) / 0402", Price=0, Replacement=NONE
C21 C26: library part 1206B102K102CG, "1nF 1000V X7R ±10% 1206 Ceramic Capacitor RoHS", Dielectric Type=X7R, Manufacturer=Walsin, Package=1206, Part Number=12065A472JAT2A, Supplier Part Number 1=791-1206B102K102CT, Temperature Range="-55°C ~ 125°C", Tolerance=±10%, Voltage=200V, Component Status=Released, Component Type=SMD, ComponentLink1Description=Datasheet, ComponentLink1URL=https://eu.mouser.com/datasheet/2/210/Middle_and_High_Voltage_DS-1535659.pdf, Part Type="Ceramic / X7R / 1206", Price=0, Replacement=NONE, Standard Lead Time="31 Weeks", Supplier 1=Mouser
C32 C33: library part CAP_TANTALUM_POLAR_CASE_B, "Capacitor Tantalum *pF ±*% *V Case B", Dielectric=X7R, Max Operating Temperature=+125°C, Min Operating Temperature=-55°C, Package="Case B", Tolerance=±*%, Voltage=20, ComponentLink1Description="Datasheet Link", Mount=SMT, Name="10мкФ ±*% 20 X7R Case B * [*]", Number of Pins=2, Type="Конденсатор танталовий"
D1: "4.25V to 40V Input Linear Voltage Regulator, 1 Output 500mA, Adjustable, TO-252-3 (DPAK)", Manufacturer=Onsemi, Package=DPAK, Supplier Part Number 1=LM317MDTRKGOSTR-ND, Temperature Range="0°C ~ 125°C", Component Status=Review, Component Type=SMD, ComponentLink1Description=Datasheet, ComponentLink1URL=https://eu.mouser.com/datasheet/2/308/LM317M_D-1810713.pdf, Part Number=LM317MDTRKG, Part Type="Power / Linear Regulator", Price=NONE, Replacement=NONE, Standard Lead Time="11 Weeks", Supplier 1=Digi-Key
D2: "Adjustable Precision Shunt Regulator, Accuracy 1%,  SOT-23-3", Manufacturer="Texas Instruments", Package=SOT-23, Supplier Part Number 1=296-17328-1-ND, Temperature Range="0°C ~ 70°C", Component Status=Released, Component Type=SMD, ComponentLink1Description=Datasheet, ComponentLink1URL=https://www.ti.com/lit/ds/symlink/tl431.pdf, Part Number=TL431ACDBZR, Part Type="Voltage Reference", Price=0.046, Replacement=NONE, Standard Lead Time="8 Weeks", Supplier 1=Digi-Key
D3: "SIMPLE SWITCHER Power Converter 150-kHz 3-A Step-Down Voltage Regulator", Manufacturer="Texas Instruments", Package=TO-263, Supplier Part Number 1=926-LM2596SX-ADJNOPB, Temperature Range="-40°C ~ 125°C", Component Status=Review, Component Type=SMD, ComponentLink1Description=Datasheet, ComponentLink1URL=http://www.ti.com/lit/ds/symlink/lm2596.pdf, Part Number=LM2596SX-ADJ/NOPB, Part Type="Power / DC-DC / Buck", Price=NONE, Replacement=NONE, Standard Lead Time="6 Weeks", Supplier 1=Mouser
D4: "1.24V to 13V Input Low Dropout Regulator, Adjustable, 1.5A, D2PAK-5", Manufacturer=Onsemi, Package=DDPAK-5, Supplier Part Number 1=863-NCP57152DSADJR4G, Temperature Range="-40°C ~ 125°C", Component Status=Released, Component Type=SMD, ComponentLink1Description=Datasheet, ComponentLink1URL=https://eu.mouser.com/datasheet/2/308/1/NCP57152_D-2317407.pdf, Part Number=NCP57152DSADJR4G, Part Type="Power / Linear Regulator", Price=1.476, Replacement=NONE, Standard Lead Time="7 Weeks", Supplier 1=Mouser
F1: "Automotive Fuse holder THT-Mount", Current=10A, Manufacturer_Name=LITTELFUSE, Manufacturer_Part_Number=17861640001, Datasheet Link=https://www.littelfuse.com/media?resourcetype=2d-prints&itemid=dcb90cf3-0771-4ccd-8726-26101cf00574&filename=ol-178.6164.0000(c), Height=17.5mm
FB1 FB2 FB3 FB4 FB5 FB6 FB7: "220 Ohms @ 100MHz Power Line Ferrite Bead 0805, 2A 45mOhm", Current=2A, Manufacturer="Murata Electronics", Package=0805, Saturation Current=NONE, Supplier Part Number 1=490-1054-2-ND, Temperature Range="-55°C ~ 125°C", Tolerance=±25%, Component Status=Released, Component Type=SMD, ComponentLink1Description=Datasheet, ComponentLink1URL=https://www.murata.com/en-us/products/productdata/8796738977822/ENFA0005.pdf, Part Number=BLM21PG221SN1D, Part Type="Ferrite Bead", Price=0.00864, Replacement=NONE, Standard Lead Time="8 Weeks", Supplier 1=Digi-Key
HG1 HG2 HG3 HG4: "Low Power LED, Green 565nm, Clear, SMD 0805, Vf 2.1V - 2.6V, 5 ~ 12mcd @ 20 mA, 130°", Color=Green, Manufacturer="Lite-On Optoelectronics", Package=0805, Part Number=FD-0805G-1, Supplier Part Number 1=160-1423-2-ND, Temperature Range="-55°C ~ 85°C", Component Status=Released, Component Type=SMD, ComponentLink1Description=Datasheet, GUID_1C=df39881f-c399-11eb-ab74-0050569f2651, Part Type="LED / 0805", Price=0.06, Replacement=NONE, Supplier 1=Digi-Key, Wavelength=565nm
K1 K2: "Miniature High Power Relay, DPDT (2 Form C), 12VDC 400mW Coil, 5.0mm 2 Pole 8A AgCdO", Manufacturer=Hongfa, Temperature Range="-40°C ~ 85°C", Ajax_1C_ID=38428, Ajax_1C_PN="HF115F/012-2ZS4 HONGFA, Реле", Ajax_1С_Status="RND Only", Component Status=Released, Component Type=PTH, ComponentLink1Description=Datasheet, ComponentLink1URL=https://www.tme.eu/Document/2962d862af219292e2e76bbc4b5ef3a2/hf115f.pdf, GUID_1C=4ba44618-64be-11ec-a90c-00505699469b, Part Number=HF115F/012-2ZS4, Part Type=Relay, Price=2.27649268, Replacement=NONE, Supplier 1=TME, Supplier Part Number 1=HF115F/012-2ZS4
L1: library part Inductor_R22.9/14/7.62, Manufacturer=Magnetics, Package=R22.9/14/7.62, PartNumber=0077310A7, Tolerance=±20%, TypeInductor="Fixed inductor", ValueManufacturerPartNumber="Fixed inductor, 10мкH, ±20%, R22.9/14/7.62, Kool Mu, µ=125, 90 нГн/витков2", AL="90 нГн/витков2", HelpURL=http://ferrite.ru/warehouse/r-22-9147-62-77310-a7.html, MaterialPermeability=µ=125, TypeMatiriel="Kool Mu"
L4: library part INDPWR_Sumida_CDRH127/LD, "FIXED IND  UH   A  MOHM SMD", Current Rating (Max)=A, DC Resistance (DCR) (Max)=мОм, Manufacturer=Sumida, Max Operating Temperature=+110°C, Min Operating Temperature=-40°C, Package="0.472\" L x 0.472\" W (12.00mm x 12.00mm)", Part Number=CDRH127/LD, Tolerance=±*%, ComponentLink1Description="Datasheet Link", Mount=SMT, Name="33 мкГн ±*% A 0.472\" L x 0.472\" W (12.00mm x 12.00mm) CDRH127/LD [Sumida]", Number of Pins=2, Type="Котушка індуктивності"
R1 R2 R3 R4 R5 R6 R9 R10 R11 R12 R15 R16 R17 R18 R19 R20 R25 R26 R27 R28 R29 R31 R32 R33 R34 R35: library part RES_0805, "RES 0.47 OHM 1% 1/8W 0805", Manufacturer="Panasonic Electronic Components", Package=0402, Part Number=ERJ-3RQFR47V, Tolerance=1%, Voltage=50V, Component Type=SMD
R7 R8: library part 3296W-1-103LF, "10 kOhms ±10% Trimmer Resistor, 0.5W, Through Hole 3/8\", 4.83x9.53mm, 10.03mm Height", Manufacturer=Bourns, Package=4.83x9.53mm, Power Rating=0.5W, Supplier Part Number 1=652-3296W-1-103LF, Temperature Range="-55°C ~ 125°C", Temperature Stability=±100ppm/°C, Tolerance=±10%, Ajax_1C_PN=NONE, Ajax_1С_Status="RND Only", Component Status="On Review", Component Type=PTH, ComponentLink1Description=Datasheet, ComponentLink1URL=https://www.bourns.com/data/global/pdfs/3296.pdf, Part Number=3296W-1-103LF, Part Type="Trimming Potentiometer", Price=NONE, Replacement=NONE, Supplier 1=Mouser
R13 R14 R21 R22 R23 R24: library part RES_THT, "RESISTORS THT", Manufacturer="Panasonic Electronic Components", Package=THT, Part Number=ERJ-3RQFR47V, Tolerance=1%, Voltage=50V, Component Type=SMD
R30: library part RES_0805, "100кОм 1% 1/8W 0805", Manufacturer="Panasonic Electronic Components", Package=0402, Part Number=ERJ-3RQFR47V, Tolerance=1%, Voltage=50V, Component Type=SMD
TP1 TP2 TP3 TP4 TP5 TP7 TP8: "0.96mm Pad for Plug-In or Receptacle", Manufacturer=NONE, Ajax_1C_PN=NONE, Ajax_1С_Status="RND Only", Component Status=Released, Component Type=PTH, ComponentLink1Description=Datasheet, ComponentLink1URL=NONE, Part Number=PAD-0.96mm, Part Type=Pad, Price=NONE, Replacement=NONE, Temperature Range=NONE
TP6: "1.75mm Pad for Plug-In or Receptacle", Manufacturer=NONE, Ajax_1C_PN=NONE, Ajax_1С_Status="RND Only", Component Status=Released, Component Type=PTH, ComponentLink1Description=Datasheet, ComponentLink1URL=NONE, Part Number=PAD-1.75mm, Part Type=Pad, Price=NONE, Replacement=NONE, Temperature Range=NONE
TR1: library part Amidon_BN43-7051, Manufacturer=Handmade, Part Number=BN43-7051, Saturation Current=11.3A, Tolerance=±20%, ComponentLink1Description=Datasheet, ComponentLink1URL=https://www.vishay.com/docs/34193/ihlp-4040dz-01.pdf
TR2: library part Amidon_BN43-202, Manufacturer=Handmade, Part Number=BN43-202, Saturation Current=11.3A, Tolerance=±20%, ComponentLink1Description=Datasheet, ComponentLink1URL=https://www.vishay.com/docs/34193/ihlp-4040dz-01.pdf
VD1: "Diode Standard 200V 3A, SMC", Current=3A, Manufacturer=Onsemi, Package=SMC, Supplier Part Number 1=ES3DFSTR-ND, Temperature Range="-50°C ~ 150°C", Voltage=200V, Component Status=Released, Component Type=SMD, ComponentLink1Description=Datasheet, Marking=ES3D, Part Number=ES3D, Part Type=General, Price=0.15, Replacement=NONE, Standard Lead Time="10 Weeks", Supplier 1=Digi-Key, Vf="0.95V @ 3A"
VD2: "Diode Schottky 40V 3A, SMA, Leakage Current 50uA", Current=3A, Manufacturer="Diodec Semiconductor", Package=SMA, Supplier Part Number 1=637-SK34SMA-3G, Temperature Range="-50°C ~ 150°C", Voltage=40V, Component Status=Released, Component Type=SMD, ComponentLink1Description=Datasheet, Part Number=SK34SMA-3G, Part Type=Schottky, Price=0.6, Replacement=NONE, Standard Lead Time="17 Weeks", Supplier 1=Mouser, Vf="0.5V @ 3A"
VD3 VD4 VD6 VD10: "Fast Switching Diode, 100V 200 mA, SOD-80C", Current=200mA, Manufacturer=Suntan, Package=SOD-80, Temperature Range="-65°C ~ 175°C", Voltage=100V, Component Status=Released, Component Type=SMD, ComponentLink1Description=Datasheet, Marking=NONE, Part Number=LL4148, Part Type="Fast Switching", Price=0.02625203, Replacement=NONE, Standard Lead Time=NONE, Vf="1V @ 10mA"
VD5 VD7 VD8: library part PESD3V3L2BT,215, "Double Bidirectional TVS Diode 26V Clamp, 15A (8/20us) Ipp, SOT-23", Current=15A, Manufacturer="Nexperia USA", Package=SOT-23, Supplier Part Number 1=771-PESD3V3L4UW115, Temperature Range="-65°C ~ 150°C", Voltage=12V, Component Status=Released, Component Type=SMD, ComponentLink1Description=Datasheet, Marking=V3*, Part Number=PESD12VL2BT.215, Part Type="TVS / ESD Protection", Price=0.05203594, Replacement=NONE, Standard Lead Time="8 Weeks", Supplier 1=Mouser
VT1: "40V, 60A max N-Channel AlphaSGT Power MOSFET, 6.1mOhm @ Vgs = 10V", Manufacturer=MOTOROLLA, Supplier Part Number 1=785-AOD66406TR-ND, Temperature Range="-55°C ~ 150°C", Component Status=Released, Component Type=SMD, ComponentLink1Description=Datasheet, ComponentLink1URL=https://aosmd.com/res/data_sheets/AOD66406.pdf, Part Number=MRF186, Part Type=N-Channel, Price=0.14350545, Replacement=NONE, Standard Lead Time="16 Weeks", Supplier 1=Digi-Key
VT2 VT4: library part IRLML9301TRPbF, "-30V, -3.6A max P-Channel HEXFET MOSFET, 82mOhm @ Vgs = -4.5V", Manufacturer="Infineon Technologies", Package=SOT-23, Temperature Range="-55°C ~ 150°C", Component Status=Released, Component Type=SMD, ComponentLink1Description=Datasheet, ComponentLink1URL=https://eu.mouser.com/datasheet/2/196/Infineon_IRLML9301_DataSheet_v01_01_EN-1732998.pdf, Id=3.6A, Part Number=IRLML9301TRPbF, Part Type=P-Channel, Price=0.05229076, Rds=103mOhm, Replacement=NONE, Standard Lead Time="77 Weeks", Supplier 1=Mouser, Supplier Part Number 1=IRLML9301TRPbF, Vds=30V
VT3: library part IRLML0100TRPBF, "100V, 1.6A max N-Channel HEXFET Power MOSFET, 190mOhm @ Vgs = 4.5V", Manufacturer="Infineon Technologies", Package=SOT-23, Supplier Part Number 1=IRLML0100TRPBFTR-ND, Temperature Range="-55°C ~ 150°C", Component Status=Released, Component Type=SMD, ComponentLink1Description=Datasheet, ComponentLink1URL=https://www.infineon.com/dgdl/irlml0100pbf.pdf?fileId=5546d462533600a4015356649d9225e8, Id=1.6A, Part Number=IRLML0100TRPBF, Part Type=N-Channel, Price=0.071, Rds=220mOhm, Replacement=NONE, Standard Lead Time="13 Weeks", Supplier 1=Digi-Key, Vds=100V
VT5: library part BC847B,215, "45V, 100mA NPN General Purpose Transistor", Manufacturer="Nexperia USA", Package=SOT-23, Supplier Part Number 1=1727-2921-2-ND, Temperature Range="-65°C ~ 150°C", Component Status=Released, Component Type=SMD, ComponentLink1Description=Datasheet, ComponentLink1URL=https://assets.nexperia.com/documents/data-sheet/BC847_SER.pdf, Ic=100mA, Part Number=BC847B,215, Part Type=NPN, Price=0.069, Replacement=NONE, Standard Lead Time="4 Weeks", Supplier 1=Digi-Key, Vce=45V
X1: library part CI3103P1V00, "WH Series 2.54mm Wire to Board Straight DIP Type Headers, 3 Pin", Manufacturer=CviLux, Temperature Range="-25℃ ~ 85℃", Component Type=PTH, ComponentLink1Description=Datasheet, Part Number=CI3103P1V00, Part Type="Wire-to-Board / Header", Price=0.04922256, Replacement=NONE
X2: library part CI3102P1H00, "WH Series 2.54mm Wire to Board Right Angle DIP Type Headers, 2 Pin", Manufacturer=CviLux, Part Number=TX_LED, Temperature Range="-25℃ ~ 85℃", Component Type=PTH, ComponentLink1Description=Datasheet, Part Type="Wire-to-Board / Header", Price=0.017, Replacement=NONE
X3: library part CI3102P1H00, "WH Series 2.54mm Wire to Board Right Angle DIP Type Headers, 2 Pin", Manufacturer=CviLux, Part Number=0B_TX, Temperature Range="-25℃ ~ 85℃", Component Type=PTH, ComponentLink1Description=Datasheet, Part Type="Wire-to-Board / Header", Price=0.017, Replacement=NONE
X4: library part CI3102P1H00, "WH Series 2.54mm Wire to Board Right Angle DIP Type Headers, 2 Pin", Manufacturer=CviLux, Part Number=ВЕНТИЛЯТОР, Temperature Range="-25℃ ~ 85℃", Component Type=PTH, ComponentLink1Description=Datasheet, Part Type="Wire-to-Board / Header", Price=0.017, Replacement=NONE
X5: library part CI3102P1H00, "WH Series 2.54mm Wire to Board Right Angle DIP Type Headers, 2 Pin", Manufacturer=CviLux, Part Number=ТЕРМОСТАТ, Temperature Range="-25℃ ~ 85℃", Component Type=PTH, ComponentLink1Description=Datasheet, Part Type="Wire-to-Board / Header", Price=0.017, Replacement=NONE
X6 X7: "50Ohm SMA Connector, Right Angle, Female, 5.1mm", Manufacturer="Wangshen Development LLC", Temperature Range="-55°C ~ 155°C", Component Type=PTH, ComponentLink1Description=Datasheet, Part Number=WSD-SMAKWE-14.5, Part Type="RF Connector", Price=NONE, Replacement=NONE
X8: "2 Pin DC Power Socket, XT30, Male, THT, Right Angle, Yellow, 15A, 500V", Manufacturer=Amass, Temperature Range="-20°C ~ 120°C", Component Type=PTH, ComponentLink1Description=Datasheet, Part Number=XT30PW-M, Part Type="Power Socket", Price=0.37753379, Replacement=NONE, Supplier 1=TME, Supplier Part Number 1=XT30PW-M
X9: library part CI3102P1H00, "WH Series 2.54mm Wire to Board Right Angle DIP Type Headers, 2 Pin", Manufacturer=CviLux, Part Number=cDISABLE_BIAS, Temperature Range="-25℃ ~ 85℃", Component Type=PTH, ComponentLink1Description=Datasheet, Part Type="Wire-to-Board / Header", Price=0.017, Replacement=NONE
Z1: library part BNX024H01L, "LC EMI Filter 5th Order Low Pass 2 Channel C = 4.7µF 20 A 6-SMD [12.1x9.1]", Manufacturer=Murata, Max Operating Temperature=+125°C, Min Operating Temperature=-55°C, Package="6-SMD [12.1x9.1]", Part Number=BNX024-H01L, ComponentLink1Description="New link", Mount=SMT, Name="BNX024-H01L [Murata]", Number of Pins=6, Type="Фільтр силовий"

## Free pads (board coordinates)
  round 7 hole 3.2: 5(17.97,4) 5(17.97,88) 5(87.97,4) 5(87.97,88) 5(136.144,88) 5(159.97,4)

## Via types
v1: diameter 0.6, hole 0.3, TOP to BOT, tented both sides, 1161 vias
v2: diameter 0.8, hole 0.4, TOP to BOT, tented both sides, 222 vias
v3: diameter 0.85, hole 0.5, TOP to BOT, tented both sides, 6 vias

## Nets (pads, with @x,y where several pads share a name; then routed paths per layer and width w, separated by ;. In a path a pad name is that pad's centre, name@x,y a point inside that pad or via, vN(x,y) a via of type N, cw(c..) or ccw(c..) an arc to the next point about the centre after c; other vN are vias at no path point)
+5V_TX: R1.1 TP8.1 VT4.3 | length 38.6
  SIG w1: v2(30.226,18.042) v2(30.226,17.28) 30.226,7.68 ccw(c31.226,7.68) 30.439,7.063 31.923,5.171 ccw(c32.71,5.788) 31.973,5.112 ccw(c32.71,5.788) 32.001,5.083 ccw(c32.711,5.787) TP8.1@32.004,5.08 32.194,4.89 ccw(c32.9,5.598) 32.344,4.767 36.202,2.198 ccw(c36.754,3.032) 36.75,2.032 44.958,2.032 50.546,7.62 v2(53.086,7.62) v2(53.848,7.62)
+12V_IN: C3.1 C32.1 FB1.1 R10.2 TP7.1 VT2.2 | length 28
  TOP w1: VT2.2@16.51,27.31 16.51,26.162 30.712,11.96 C3.1@37.465,11.96
+12V_TX: C4.1 C24.2 C27.2 FB3.2 K1.2 K2.2 R9.2 R12.1 R16.1 TP4.1 VD6.CA VD10.CA VT2.3 | length 355.5
  TOP w0.2: R12.1@12.395,23.495 15.53,23.495 ccw(c15.529,23.695) 15.596,23.507 v2(15.85,23.597)
  TOP w0.5: R9.2@15.786,40.64 v3(17.526,40.64)
  TOP w0.6: v2@156.464,38.1 156.464,38.046 156.515,37.995 R16.1@156.515,36.195
  TOP w1: C4.1@17.526,80.01 17.526,82.55 18.505,83.529 C27.2@20.447,83.529 22.59,83.529 VD10.CA@22.606,83.513 24.103,83.513 K2.2@28.19,87.6 ; FB3.2@83.312,15.682 v2(83.312,24.384) ; C24.2@137.414,83.566 VD6.CA@139.7,83.566 142.494,83.566 144.19,85.262 K1.2@144.19,87.6
  SIG w0.2: v2(15.85,23.597) v3(19.955,28.26)
  SIG w1: v3(17.526,78.486) v3(17.526,40.64) 17.526,39.616 16.764,38.854 16.764,31.451 v3(19.955,28.26) ; K2.2@28.19,87.6 31.632,82.927 31.634,82.925 ccw(c32.438,83.52) 31.664,82.887 33.43,80.741 33.431,80.739 ccw(c34.202,81.376) 33.602,80.576 ccw(c34.202,81.376) 34,80.397 34.973,80.198 ccw(c35.171,81.179) 35.205,80.179 cw(c35.242,79.18) 35.511,80.143 36.14,79.97 ccw(c36.406,80.934) 36.406,79.934 131.468,79.934 ccw(c131.465,80.934) 131.642,79.949 132.35,80.076 ccw(c132.174,81.061) 132.88,80.353 134.738,82.211 cw(c135.444,81.503) 135.052,82.423 137.295,83.378 cw(c137.687,82.457) 137.596,83.453 140.436,83.714 ccw(c140.345,84.71) 140.538,83.728 141.812,83.979 141.813,83.98 ccw(c141.619,84.96) 142.003,84.037 ccw(c141.619,84.96) 142.391,84.326 143.755,85.986 ccw(c142.983,86.621) 143.783,86.021 ccw(c142.983,86.621) 143.964,86.431 K1.2@144.19,87.6 145.529,86.598 cw(c144.324,84.988) 145.744,86.412 156.223,75.933 cw(c155.515,75.227) 156.315,75.827 cw(c155.515,75.227) 156.515,75.227 v2(156.515,38.1) 97.028,38.1 v2(83.312,24.384)